# EAGLE board g3d2_ctrl (EAGLE 5.11)
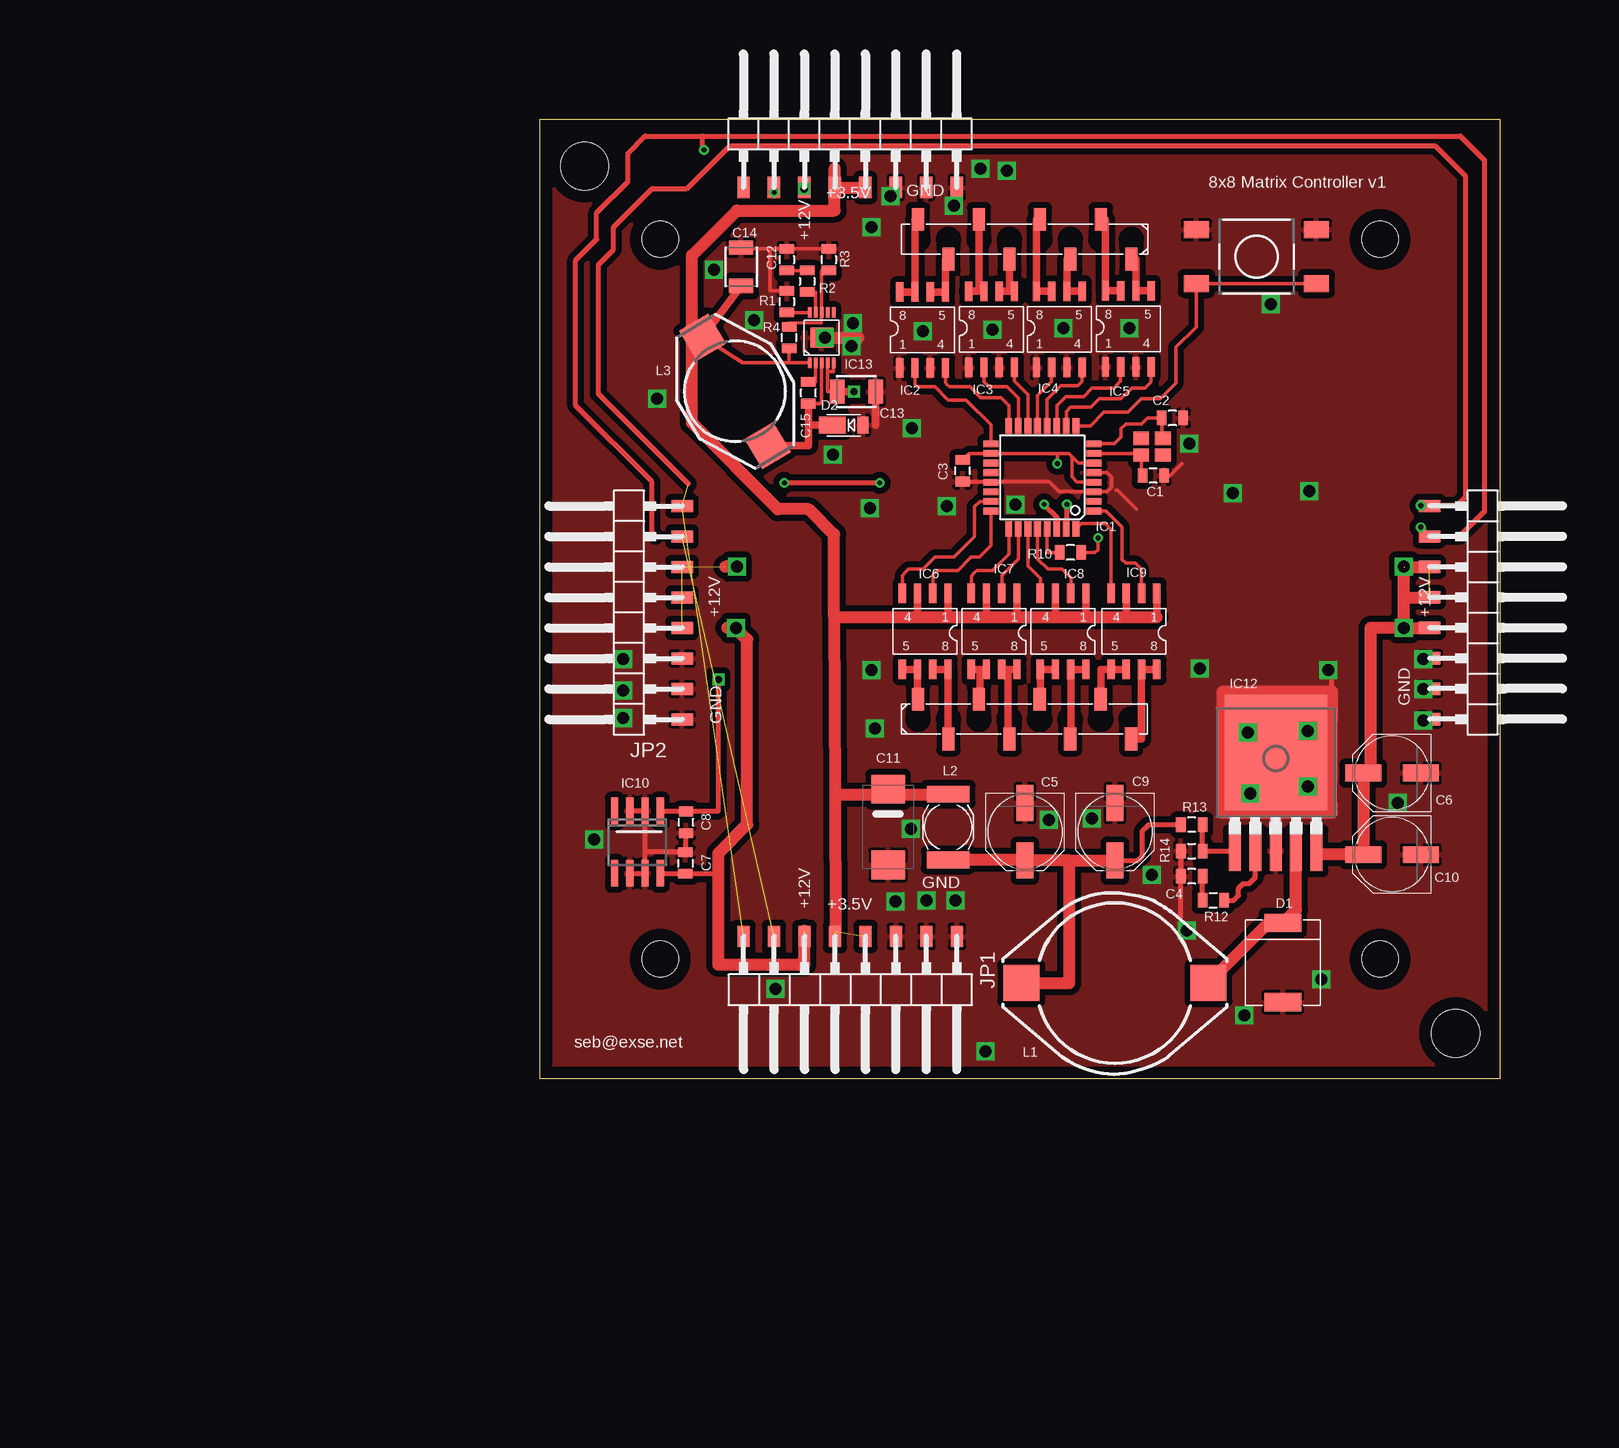
[diagram p0: board, top side]
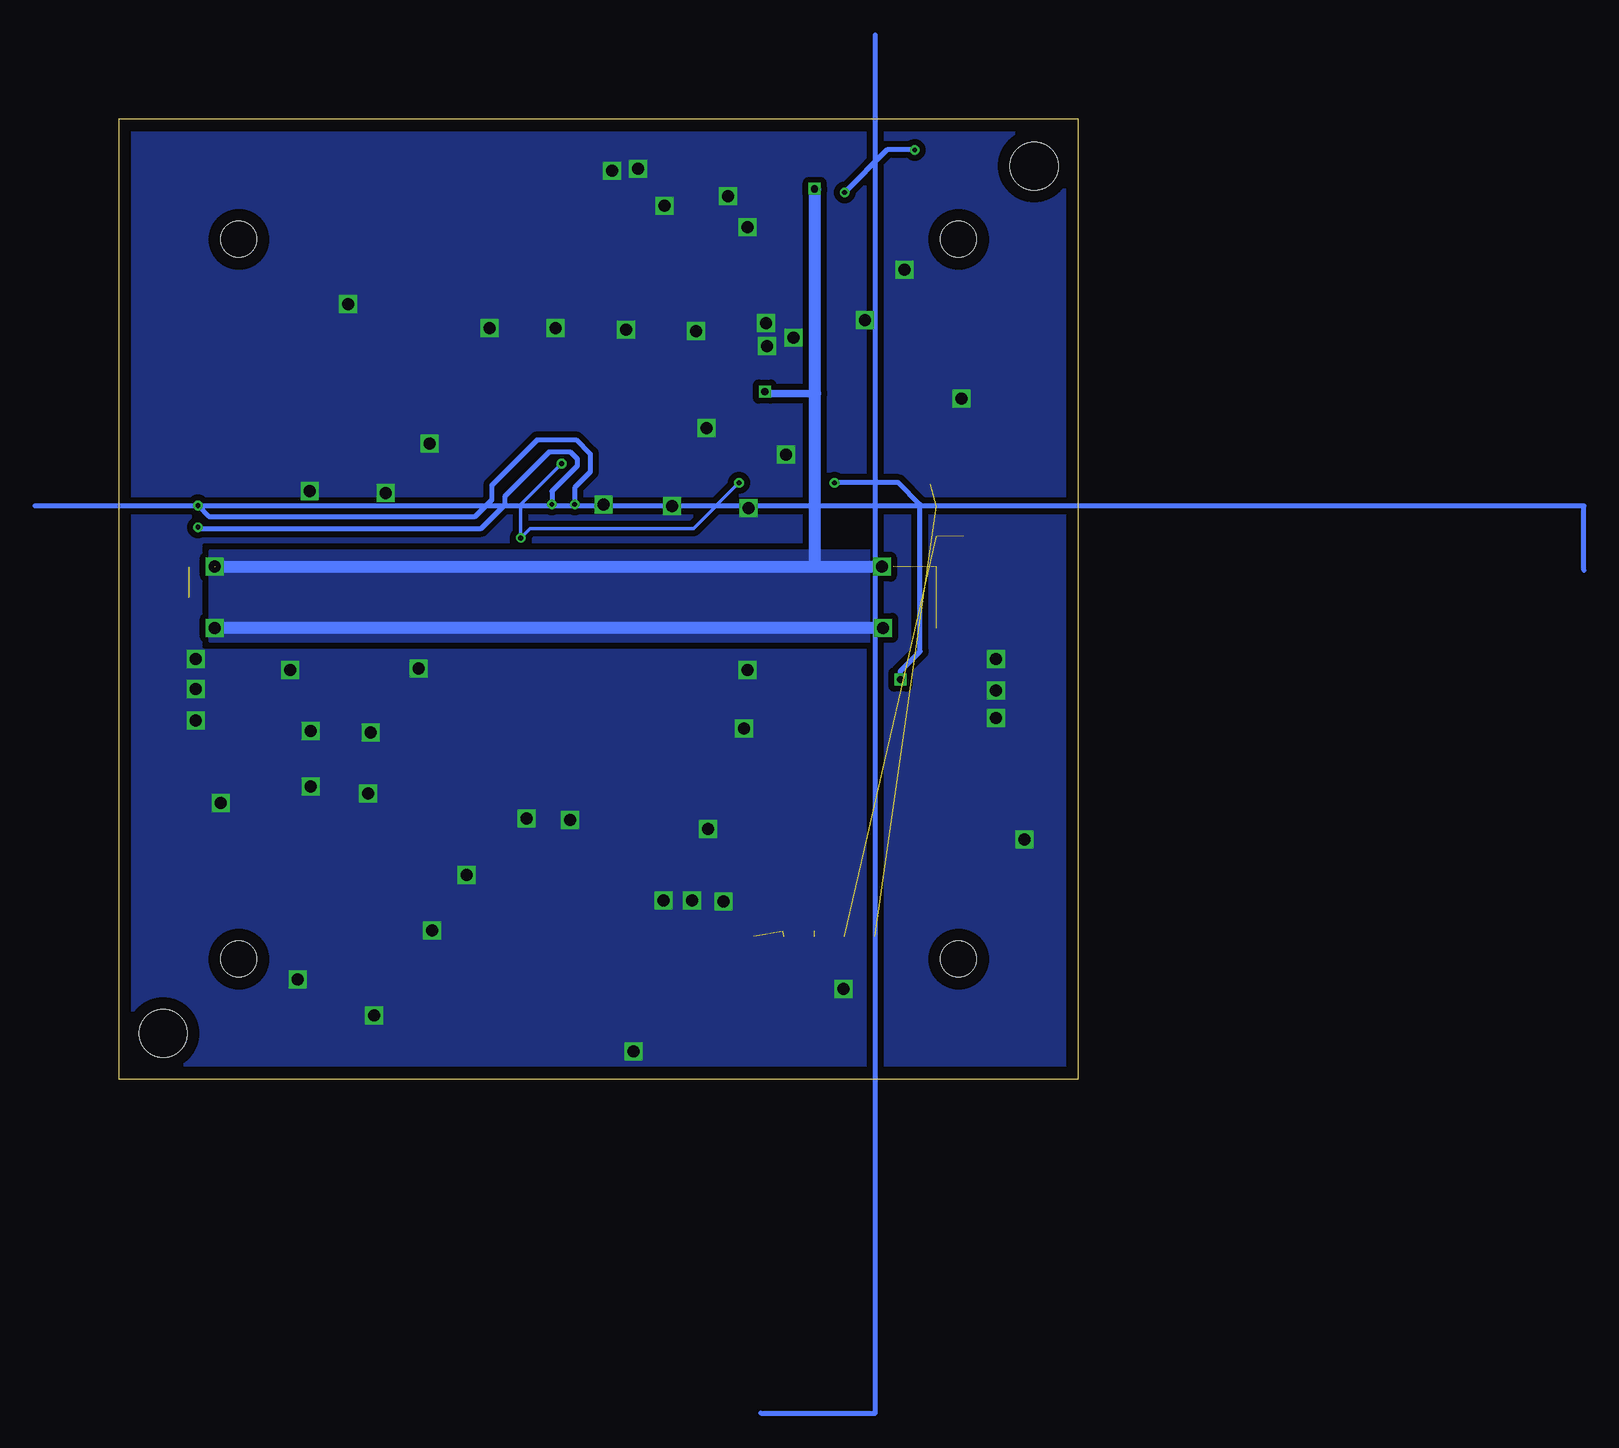
[diagram p1: board, bottom side, seen from below]

Size 80 x 80 mm. Coordinates in mm from the lower left corner, seen from the top.
Outline: 80,0 0,0 0,80 80,80 80,0
Copper layers (1*16): Top 0.035mm / dielectric 1.5mm / Bottom 0.035mm
Design rules "default *": minimum track width 10mil, minimum drill 24mil, track to track 8mil, track to pad 8mil, pad to pad 8mil, via to via 8mil, smd to smd 8mil, copper to edge 40mil, drill to drill 8mil, minimum pad ring 10mil, minimum via ring 8mil, stop-mask expansion 4mil, vias tented up to drill 40mil, thermal gap 10mil
Holes 3 mm at 70,70 10,70 10,10 70,10
Holes 4 mm at 3.7,76.1 76.3,3.8

## Footprints (pad centres in the part's own frame; a part is rotated, then mirrored left to right if it is on the bottom)
0805 = smd 0.8 x 1.2: 1 -0.9,0; 2 0.9,0
PANASONIC_D = smd 3 x 1.4: + 2.4,0; - -2.4,0
SMC_D = smd 2.4 x 2.8: + -3.15,0; - 3.15,0
1210 = smd 1.2 x 2: 1 -1.6,0; 2 1.6,0
DO214AB = smd 1.52 x 3.07: A 3.305,0; K -3.305,0
POWERDI_123 = smd 0.9 x 1.4: A 1.6,0 | smd 2.2 x 1.4: K -0.95,0
TQFP32-08 = smd 1.27 x 0.559: 1 -4.293,2.8; 2 -4.293,2; 3 -4.293,1.2; 4 -4.293,0.4; 5 -4.293,-0.4; 6 -4.293,-1.2; 7 -4.293,-2; 8 -4.293,-2.8; 17 4.293,-2.8; 18 4.293,-2; 19 4.293,-1.2; 20 4.293,-0.4; 21 4.293,0.4; 22 4.293,1.2; 23 4.293,2; 24 4.293,2.8 | smd 0.559 x 1.27: 9 -2.8,-4.293; 10 -2,-4.293; 11 -1.2,-4.293; 12 -0.4,-4.293; 13 0.4,-4.293; 14 1.2,-4.293; 15 2,-4.293; 16 2.8,-4.293; 25 2.8,4.293; 26 2,4.293; 27 1.2,4.293; 28 0.4,4.293; 29 -0.4,4.293; 30 -1.2,4.293; 31 -2,4.293; 32 -2.8,4.293
SO8-2 = smd 0.61 x 1.626: 1 -2.54,-2.54; 2 -1.27,-2.54; 3 0,-2.54; 4 1.27,-2.54; 5 1.27,3.81; 6 0,3.81; 7 -1.27,3.81; 8 -2.54,3.81
SO08 = smd 0.6 x 2.2: 1 -1.905,-2.6; 2 -0.635,-2.6; 3 0.635,-2.6; 4 1.905,-2.6; 5 1.905,2.6; 6 0.635,2.6; 7 -0.635,2.6; 8 -1.905,2.6
Q5-DD = smd 1 x 3.4: 1 -3.4,-7.875; 2 -1.7,-7.875; 3 0,-7.875; 4 1.7,-7.875; 5 3.4,-7.875 | smd 8.5 x 9.6: 6 0,0.325
MSOP10-PAD = smd 0.305 x 0.889: 1 -1,-2.095; 2 -0.5,-2.095; 3 0,-2.095; 4 0.5,-2.095; 5 1,-2.095; 6 1,2.095; 7 0.5,2.095; 8 0,2.095; 9 -0.5,2.095; 10 -1,2.095 | smd 1.88 x 1.68: PAD 0,0
1X08SMD/90 = smd 1.016 x 1.778: 1 -1.27,-5.08; 2 1.27,-5.08; 3 3.81,-5.08; 4 6.35,-5.08; 5 8.89,-5.08; 6 11.43,-5.08; 7 13.97,-5.08; 8 16.51,-5.08
PISR = smd 3 x 3: P$1 -7.8,0; P$2 7.8,0
PISG = smd 1.4 x 3.56: P$1 -2.73,0; P$2 2.73,0
DO3316P = smd 2.92 x 2.79: 1 -5.28,0; 2 5.28,0
X22 = smd 1.3 x 1.1: 1 0.9,0.7; 2 -0.9,0.7; 3 -0.9,-0.7; 4 0.9,-0.7
LSH = smd 2.1 x 1.4: 1 -5.005,2.24; 2 5.015,2.24; 3 -5.005,-2.24; 4 5.005,-2.24
RECEPTABLE_1X8_VERT_SMT = smd 1.02 x 1.9: P1 -7.62,1.65; P2 -5.08,-1.65; P3 -2.54,1.65; P4 0,-1.65; P5 2.54,1.65; P6 5.08,-1.65; P7 7.62,1.65; P8 10.16,-1.65

## Placement (x,y rotation side)
C1  22pF  [0805]  51.1,50.3 180 top
C2  22pF  [0805]  52.7,55.1 180 top
C3  100nF  [0805]  35.2,50.7 90 top
C4  10nF  [0805]  54.3,16.9 180 top
C5  330µF/6,3V  [PANASONIC_D]  40.4,20.6 270 top
C6  100µF/35V  [PANASONIC_D]  71,25.5 180 top
C7  330nF  [0805]  12.1,18 270 top
C8  10nF  [0805]  12.15,21.4 90 top
C9  300µF/6,3V  [PANASONIC_D]  47.9,20.6 270 top
C10  100µF/35V  [PANASONIC_D]  71,18.7 180 top
C11  200µF 10V  [SMC_D]  29,21 270 top
C12  470pF  [0805]  20.55,68.3 270 top
C13  4.7µF 50V  [1210]  26.35,57.3 0 top
C14  22µF 6V  [1210]  16.75,67.7 90 top
C15  0,47µF  [0805]  22.35,57.2 90 top
D1  mbrs340  [DO214AB]  61.9,9.7 270 top
D2  DFLS240L  [POWERDI_123]  25.3,54.5 0 top
IC1  atmega88pa  [TQFP32-08]  41.85,50.15 180 top
IC2  IRF7103  [SO8-2]  32.5,61.8 0 top
IC3  IRF7103  [SO8-2]  38.25,61.85 0 top
IC4  IRF7103  [SO8-2]  43.9,61.85 0 top
IC5  IRF7103  [SO8-2]  49.65,61.9 0 top
IC6  IRF7104  [SO8-2]  31.45,37.95 180 top
IC7  IRF7104  [SO8-2]  37.2,37.95 180 top
IC8  IRF7104  [SO8-2]  42.95,37.95 180 top
IC9  IRF7104  [SO8-2]  48.85,37.95 180 top
IC10  78L05SMD  [SO08]  8.1,19.75 180 top
IC12  LT1076  [Q5-DD]  61.3,26.9 0 top
IC13  LT3480  [MSOP10-PAD]  23.45,61.8 0 top
JP1  [1X08SMD/90]  33.46,6.81 180 top
JP2  [1X08SMD/90]  6.75,31.25 90 top
JP3  [1X08SMD/90]  79.2,46.5 270 top
JP4  [1X08SMD/90]  18.2,79.4 0 top
L1  100µH/3a  [PISR]  47.9,8 180 top
L2  5µH 2.5A  [PISG]  34,21 90 top
L3  4,7µF 2.5A  [DO3316P]  16.25,57.32 121 top
Q1  20Mhz  [X22]  51,52.7 0 top
R1  39k  [0805]  20.55,64.8 270 top
R2  15k  [0805]  22.25,66.5 270 top
R3  100k  [0805]  24.05,68.3 270 top
R4  330k  [0805]  20.75,61.8 90 top
R10  4,7k  [0805]  44.2,43.9 180 top
R12  2k7  [0805]  56.1,14.9 0 top
R13  2k7  [0805]  54.3,21.2 180 top
R14  4k7  [0805]  54.3,19 0 top
U$1  LSH  [LSH]  59.7,68.55 180 top
U$2  RECEPTABLE_1X8_VERT_SMT  [RECEPTABLE_1X8_VERT_SMT]  39.1,30 0 top
U$3  RECEPTABLE_1X8_VERT_SMT  [RECEPTABLE_1X8_VERT_SMT]  41.65,70 180 top

## Library data of the parts
C1-C4 C7 C8 C12-C15 R1-R4 R10 R12-R14 = SparkFun
C5 = rcl; REICHELT: VF 330/6,3 P-D8; RIPPLE: 500 mA
C6 = rcl; REICHELT: VF 100/35 P-D8; RIPPLE: 500 mA
C9-C11 = rcl
D1 D2 IC12 IC13 L1 L2 Q1 U$2 U$3 = seb
IC1 = avr-4
IC2-IC9 = irf-2
IC10 = linear
JP1-JP4 = pinhead-2
L3 = inductor-coilcraft; OC_FARNELL: unknown; OC_NEWARK: unknown
U$1 = switch-tact

## Nets
+5V: C3.2 C8.2 IC1.4 IC1.6 IC1.18 IC10.1 R10.1
+12V: C6.+ C7.2 C10.+ C13.1 IC10.8 IC12.5 IC13.4 IC13.5 JP1.6 JP2.4 JP2.5 JP2.6 JP3.3 JP3.4 JP3.5 JP4.3
COL0: IC1.10 IC5.4
COL1: IC1.11 IC5.2
COL2: IC1.12 IC4.4
COL3: IC1.13 IC4.2
COL4: IC1.14 IC3.4
COL5: IC1.15 IC3.2
COL6: IC1.16 IC2.4
COL7: IC1.17 IC2.2
COL_0: IC5.5 IC5.6 U$3.P1
COL_1: IC5.7 IC5.8 U$3.P2
COL_2: IC4.5 IC4.6 U$3.P3
COL_3: IC4.7 IC4.8 U$3.P4
COL_4: IC3.5 IC3.6 U$3.P5
COL_5: IC3.7 IC3.8 U$3.P6
COL_6: IC2.5 IC2.6 U$3.P7
COL_7: IC2.7 IC2.8 U$3.P8
GND: C1.1 C2.1 C3.1 C4.2 C5.- C6.- C7.1 C8.1 C9.- C10.- C11.- C12.1 C13.2 C14.2 D1.A D2.A IC1.3 IC1.5 IC1.21 IC2.1 IC2.3 IC3.1 IC3.3 IC4.1 IC4.3 IC5.1 IC5.3 IC10.2 IC10.3 IC10.6 IC10.7 IC12.3 IC13.PAD JP1.1 JP1.2 JP1.3 JP2.1 JP2.2 JP2.3 JP3.6 JP3.7 JP3.8 JP4.6 JP4.7 JP4.8 R1.1 R3.1 R14.1 U$1.3 U$1.4
N$1: C2.2 IC1.8 Q1.1
N$2: C5.+ C9.+ L1.P$2 L2.P$1 R13.2
N$3: C1.2 IC1.7 Q1.3
N$4: IC1.29 R10.2
N$5: IC12.1 R13.1 R14.2
N$6: IC13.10 R1.2
N$7: IC1.9 U$1.1 U$1.2
N$8: C15.1 D2.K IC13.3 L3.1
N$9: C12.2 R2.1
N$10: IC13.9 R2.2
N$12: IC13.8 R3.2 R4.2
N$15: C15.2 IC13.2
N$17: C4.1 R12.1
N$18: IC12.2 R12.2
N$19: D1.K IC12.4 L1.P$1
ROW0: IC1.23 IC6.4
ROW1: IC1.24 IC6.2
ROW2: IC1.25 IC7.4
ROW3: IC1.26 IC7.2
ROW4: IC1.27 IC8.4
ROW5: IC1.28 IC8.2
ROW6: IC1.32 IC9.4
ROW7: IC1.1 IC9.2
ROW_0: IC6.5 IC6.6 U$2.P1
ROW_1: IC6.7 IC6.8 U$2.P2
ROW_2: IC7.5 IC7.6 U$2.P3
ROW_3: IC7.7 IC7.8 U$2.P4
ROW_4: IC8.5 IC8.6 U$2.P5
ROW_5: IC8.7 IC8.8 U$2.P6
ROW_6: IC9.5 IC9.6 U$2.P7
ROW_7: IC9.7 IC9.8 U$2.P8
RX: IC1.30 JP1.8 JP2.8 JP3.1 JP4.1
TX: IC1.31 JP1.7 JP2.7 JP3.2 JP4.2
VCC: C11.+ C14.1 IC6.1 IC6.3 IC7.1 IC7.3 IC8.1 IC8.3 IC9.1 IC9.3 IC13.1 JP1.4 JP1.5 JP4.4 JP4.5 L2.P$2 L3.2 R4.1

## Tracks (layer width: path | path; a pad name or v marks a point on that pad's centre or on a via)
+5V  (via drill 0.4, 0.6)
  Top 0.305: C3.2 35.75,52.15 IC1.18 43.2,52.15 | 43.2,52.15 44.05,52.15 44.1,52.1 | 44.1,52.1 44.8,51.4 44.85,51.35 IC1.6 | IC1.4 44.75,49.75 44.3,50.2 44.3,51.9 44.1,52.1 | R10.1 46.2,43.9 46.5,44.1 v46.5,45.1 | v43.1,51.3 43.1,52.05 43.2,52.15
  Top 0.406: 12.15,22.35 C8.2 | IC10.1 12.15,22.35 | 12.15,22.35 14.85,22.35 v14.85,33.3 | v20.35,49.7 v28.3,49.7
  Bottom 0.305: v43.1,51.3 46.5,47.9 v46.5,45.1 45.7,45.9 32.1,45.9 v28.3,49.7
  Bottom 0.406: v14.85,33.3 14.85,34 13.2,35.65 13.2,47.9 15,49.7 v20.35,49.7
+12V  (via drill 0.6, 1)  (6 unrouted)
  Top 0.305: 23.95,58.95 23.95,57.3 C13.1 | 23.95,58.95 IC13.4 | IC13.5 24.45,58.95 23.95,58.95
  Top 0.406: IC10.8 10.01,17.1 C7.2 14.85,17.1 14.85,16.3
  Top 0.61: v26.15,57.3 C13.1
  Top 1.016: v16.4,42.7 15.41,42.71 | v72.01,42.69 JP3.3 | 71.95,40.15 JP3.4 | 15.57,37.63 v16.3,37.6 17.25,36.65 17.25,21.2 14.85,18.8 14.85,16.3 14.85,9.55 22.01,9.55 | v72,37.6 72.41,37.61 JP3.5 | 22.01,9.55 22.01,12.34 | 22.01,9.55 21.99,10.23 | IC12.5 64.7,18.7 C10.+ C6.+ 69.2,25.5 69.2,37.6 v72,37.6 | JP4.3 v22,74.21 v22,74.2 | v72,37.6 v72,42.7
  Bottom 0.61: v26.15,57.3 25.9,57.15 21.95,57.15
  Bottom 1.016: 21.95,42.7 v16.4,42.7 | v16.3,37.6 v72,37.6 | v22,74.2 21.95,74.15 21.95,57.15 21.95,42.7 | v72,42.7 21.95,42.7
  pour Bottom: 17,36.5 72.4,36.5 72.4,44 17,44
COL0
  Top 0.305: IC1.10 43.85,55.65 44.2,56 45.9,56 46.6,56.7 48.4,56.7 49.3,57.6 50.4,57.6 50.8,58 50.92,58.12 IC5.4
COL1
  Top 0.305: IC1.11 43.05,56.15 43.8,56.9 45.3,56.9 46,57.6 47.8,57.6 48.2,58 48.38,58.18 IC5.2
COL2
  Top 0.305: IC1.12 42.25,56.65 43.4,57.8 44.8,57.8 45.1,58.1 45.17,58.17 IC4.4
COL3
  Top 0.305: IC1.13 41.45,56.95 42.63,58.13 IC4.2
COL4
  Top 0.305: IC1.14 40.65,57.05 40.2,57.5 39.52,58.18 IC3.4
COL5
  Top 0.305: IC1.15 39.85,56.75 38.9,57.7 37.4,57.7 37.1,58 36.98,58.12 IC3.2
COL6
  Top 0.305: IC1.16 39.05,56.15 38.4,56.8 36.7,56.8 35.8,57.7 34.1,57.7 33.9,57.9 33.77,58.03 IC2.4
COL7
  Top 0.305: IC1.17 37.56,54.54 35.5,56.6 34,56.6 32.9,57.7 31.4,57.7 31.3,57.8 31.23,57.87 IC2.2
COL_0
  Top 0.61: IC5.5 IC5.6 49.65,68.35 U$3.P1
COL_1
  Top 0.61: IC5.7 IC5.8 47.11,71.65 U$3.P2
COL_2
  Top 0.61: IC4.5 IC4.6 43.9,68.35 U$3.P3
COL_3
  Top 0.61: IC4.7 IC4.8 41.36,71.65 U$3.P4
COL_4
  Top 0.61: IC3.6 IC3.5 39.11,66.07 U$3.P5
COL_5
  Top 0.61: IC3.8 IC3.7 36.57,66.07 U$3.P6
COL_6
  Top 0.61: IC2.6 IC2.5 33.77,68.35 U$3.P7
COL_7
  Top 0.61: IC2.8 IC2.7 31.23,71.65 U$3.P8
GND  (via drill 1)
  Top 0.305: IC1.21 35.2,49.75 C3.1 42.4,49.8 43.25,48.95 IC1.3 47.25,48.95 47.6,49.3 47.6,50.2 47.25,50.55 IC1.5 | C1.1 52.5,50.3 53.5,51.3 | 48,49.1 48.1,49.1 49.7,47.5 | R1.1 19.15,65.7 19.15,69.2 | 19.15,69.2 C12.1 R3.1 | C14.2 16.75,69.2 19.15,69.2
  Top 0.406: C4.2 R14.1 53.4,13.5 | IC10.6 IC10.7 8.73,18.95 | IC10.3 IC10.2 8.73,18.95 | 8.73,18.95 12.1,18.95 C7.1 12.15,18.9 C8.1 | v65.7,34.1 66,33.8 66,32.3
  Top 0.61: 27.95,54.5 C13.2
  Top 1.016: IC12.3 61.3,26.55 | 65.9,22.3 66,32.3 56.9,32.3 56.8,22.3 56.8,22.2 66,22.2 66,22.8 | IC13.PAD 26.5,61.8 v25.95,61.1
  other vias: 53.9,12.4 64,29 51,17 71.5,23 59,28.9 64,24.4 4.5,19.95 54.1,52.95 60.9,64.6 29.2,73.6 27.6,71 57.75,48.85 43.6,62.6 55,34.2 27.5,47.6 33.9,47.75 31.9,62.35 42.4,21.6 19.6,7.5 46,21.7 49.1,62.6 34.5,72.8 38.9,75.7 59.2,23.8 39.6,47.9 37.1,2.3 9.75,56.7 73.6,29.9 73.6,32.5 73.6,35 6.9,30.1 6.9,32.4 6.9,35 29.6,14.8 27.9,29.2 30.89,20.85 27.6,34.1 37.7,62.45 36.7,75.9 31,54.25 64.1,49 65.1,8.3 58.7,5.3 32.2,14.9 34.6,14.9 17.8,63.25 24.4,52.05 14.5,67.45 23.75,61.8 26.05,63
  pour Top (isolate 0.5, rank 2): 0,80 80,80 80,0 0,0
  pour Bottom (isolate 0.5, rank 2): 0,80 80,80 80,0 0,0
N$1
  Top 0.305: Q1.1 51.8,53.5 C2.2 50.6,55.1 50.1,54.6 48.8,54.6 48.4,54.2 48.4,53.5 47.85,52.95 IC1.8
N$2
  Top 0.406: C9.+ 49.8,18.2 50.2,18.6 50.2,20.7 50.6,21.1 50.7,21.2 R13.2
  Top 1.016: L1.P$2 40.6,8 L1.P$2 | 44.1,18.2 C5.+ 40.4,18.27 L2.P$1 | 44.1,18.2 C9.+ | L1.P$2 44.1,8 44.1,18.2
N$3
  Top 0.305: C1.2 50.1,50.4 Q1.3 49.95,52.15 IC1.7
N$4
  Top 0.305: R10.2 42.25,43.9 IC1.29
N$5
  Top 0.406: IC12.1 57.9,19 R14.2 R13.1
N$6
  Top 0.305: IC13.10 20.75,63.9 R1.2
N$7
  Top 0.305: IC1.9 45.84,54.44 47,55.6 49,55.6 50.1,56.7 51.1,56.7 51.7,56.7 53,58 53,61 54.6,62.6 54.69,62.69 U$1.2 U$1.1
N$8
  Top 0.305: IC13.3 23.45,56.3 C15.1
  Top 0.61: L3.1 22.35,52.82 22.35,54.6 | 22.35,54.6 C15.1 | 22.35,54.6 22.55,54.5 D2.K
N$9
  Top 0.305: R2.1 C12.2
N$10
  Top 0.305: IC13.9 22.95,65.6 R2.2
N$11
  Bottom 0.406: 87,47.77 -42.13,47.77 -42.13,42.41
N$12
  Top 0.254: IC13.8 23.45,63.05 21.4,63.05 20.75,63.05 R4.2
  Top 0.305: IC13.8 23.45,67.4 R3.2
N$13
  Bottom 0.406: 16.93,87.04 16.93,-27.85 26.48,-27.85
N$15
  Top 0.305: IC13.2 22.95,58.1 C15.2
N$17
  Top 0.406: R12.1 55.2,15 C4.1
N$18
  Top 0.406: R12.2 57.8,14.9 58.2,15.3 58.2,15.9 58.6,16.3 59.1,16.3 59.3,16.5 59.6,16.8 IC12.2
N$19
  Top 1.016: L1.P$1 60.7,13.01 D1.K 63,14.11 IC12.4
ROW0
  Top 0.305: IC1.23 36.65,48.15 36.2,47.7 36.2,45.2 34.5,43.5 32.9,43.5 31.9,42.5 30.7,42.5 30.4,42.2 30.18,41.98 IC6.4
ROW1
  Top 0.305: IC1.24 37.56,44.46 36.6,43.5 35.9,43.5 34.8,42.4 33.1,42.4 32.9,42.2 32.72,42.02 IC6.2
ROW2
  Top 0.305: IC1.25 39.05,43.75 37.7,42.4 36.4,42.4 36.2,42.2 35.93,41.93 IC7.4
ROW3
  Top 0.305: IC1.26 39.85,43.35 39.1,42.6 38.47,41.97 IC7.2
ROW4
  Top 0.305: IC1.27 40.65,42.75 41.3,42.1 41.68,41.72 IC8.4
ROW5
  Top 0.305: IC1.28 41.45,43.35 42.3,42.5 43.5,42.5 43.7,42.3 44.22,41.78 IC8.2
ROW6
  Top 0.305: IC9.4 47.58,45.22 47.58,45.82 47.1,46.3 45.09,46.3 IC1.32
ROW7
  Top 0.305: IC1.1 47.15,47.35 48.5,46 48.5,43.3 48.8,43 49.6,43 49.9,42.7 50.12,42.48 IC9.2
ROW_0
  Top 0.61: IC6.5 IC6.6 31.45,31.65 U$2.P1
ROW_1
  Top 0.61: IC6.7 IC6.8 33.99,28.35 U$2.P2
ROW_2
  Top 0.61: 36.65,34.14 IC7.5 | 36.65,34.14 IC7.6 | U$2.P3 36.65,31.65 36.65,34.14
ROW_3
  Top 0.61: 39,34.14 IC7.7 | 39,34.14 IC7.8 | U$2.P4 39,28.35 39,34.14
ROW_4
  Top 0.61: IC8.6 IC8.5 41.68,31.65 U$2.P5
ROW_5
  Top 0.61: IC8.8 IC8.7 44.22,28.35 U$2.P6
ROW_6
  Top 0.61: IC9.6 IC9.5 46.72,34.14 U$2.P7
ROW_7
  Top 0.61: U$2.P8 50.12,28.35 IC9.7 IC9.8
RX  (via drill 0.4)  (2 unrouted)
  Top 0.406: 16.93,77.8 74.6,77.8 77.1,75.3 77.1,48.5 76.4,47.8 74.25,47.8 JP3.1 74.19,47.8 v73.4,47.8 | IC1.30 43.05,46.85 v42,47.9 | 12.34,49.61 4.85,57.1 4.85,67.9 6.1,69.15 6.1,71 9.32,74.22 12.22,74.22 15.8,77.8 16.93,77.8 | 16.93,77.8 JP4.1
  Bottom 0.406: v73.4,47.8 72.5,46.9 50.3,46.9 48.9,48.3 48.9,49.5 45.1,53.3 41.9,53.3 40.7,52.1 40.7,50.6 42,49.3 v42,47.9
TX  (via drill 0.4)  (2 unrouted)
  Top 0.406: 9.6,45.25 9.3,45.55 9.3,49.8 2.95,56.15 2.95,68.25 4.7,70 4.7,72.2 7.3,74.8 7.3,77.15 8.75,78.6 13.5,78.6 | IC1.31 43.85,47.85 v43.9,47.9 | v73.4,46 74.17,45.23 JP3.2 76.63,45.23 78.7,47.3 78.7,76.6 76.7,78.6 13.5,78.6 | JP4.2 19.5,74.19 v19.5,73.9 | v13.65,77.45 13.5,77.6 13.5,78.6
  Bottom 0.406: v73.4,46 73.3,45.9 49.8,45.9 47.8,47.9 47.8,48.6 44.1,52.3 42.4,52.3 41.8,51.7 41.8,51.1 43.9,49 v43.9,47.9 | v19.5,73.9 15.95,77.45 v13.65,77.45
VCC  (2 unrouted)
  Top 0.305: 20.75,59.71 16.85,59.71 13.95,61.58 L3.2 | 20.75,59.71 IC13.1 | 20.75,59.71 R4.1
  Top 0.406: 24.57,12.3 24.64,12.3
  Top 0.61: 51.39,38.5 IC9.1 | 48.85,38.5 IC9.3 | 45.49,38.5 IC8.1 | 42.95,38.5 IC8.3 | 39.74,38.5 IC7.1 | 37.2,38.5 IC7.3 | 33.99,38.5 IC6.1 | 31.45,38.5 IC6.3 | L3.2 C14.1
  Top 1.016: JP4.5 JP4.4 24.54,75.92 24.54,72.4 16.4,72.4 12.65,68.65 12.65,62.33 | 24.64,12.3 24.59,24 | 24.59,24 24.54,38.5 | 24.54,38.5 31.45,38.5 33.99,38.5 37.2,38.5 39.74,38.5 42.95,38.5 45.49,38.5 48.85,38.5 51.39,38.5 | 29,23.73 L2.P$2 | 29,23.73 C11.+ | 29,23.73 24.59,23.73 24.59,24 | 12.65,62.33 13.95,61.58 | 12.65,62.33 12.65,54.7 19.8,47.5 22.4,47.5 24.5,45.4 24.5,38.54 24.54,38.5

## Text on the board
tPlace: GND | 8x8 Matrix Controller v1 | +3.5V | +12V | +12V | +12V | GND | GND | GND | +12V | +3.5V | seb@exse.net
tValues: 20Mhz X22